# EAGLE board BaromBoard (EAGLE 6.3)
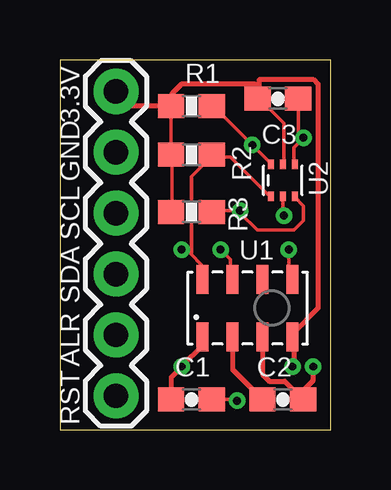
[diagram p0: board, top side]
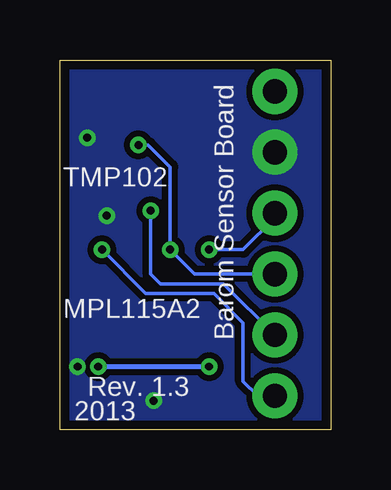
[diagram p1: board, bottom side, seen from below]

Size 11.3 x 15.43 mm. Coordinates in mm from the lower left corner, seen from the top.
Outline: 0,0 11.3,0 11.3,15.43 0,15.43 0,0
Copper layers (1*16): Top 0.0356mm / dielectric 1.5011mm / Bottom 0.0356mm
Design rules "LaenPCBOrder *": minimum track width 6mil, minimum drill 13mil, track to track 6mil, track to pad 6mil, pad to pad 6mil, via to via 6mil, smd to smd 6mil, copper to edge 15mil, drill to drill 6mil, minimum pad ring 7mil, minimum via ring 7mil, stop-mask expansion 4mil, vias tented up to drill 13mil, thermal gap 10mil

## Footprints (pad centres in the part's own frame; a part is rotated, then mirrored left to right if it is on the bottom)
0603-CAP = smd 1.1 x 1: 1 -0.85,0; 2 0.85,0
1X06 = drill 1.016 pad 1.88: 1 0,0; 2 2.54,0; 3 5.08,0; 4 7.62,0; 5 10.16,0; 6 12.7,0
0603-RES = smd 1.1 x 1: 1 -0.85,0; 2 0.85,0
SOT563 = smd 0.25 x 0.4: 1 -0.5,-0.66; 2 0,-0.66; 3 0.5,-0.66; 4 0.5,0.66; 5 0,0.66; 6 -0.5,0.67
LGA8 = smd 1.2 x 0.5: 1 -1.2,1.875; 2 -1.2,0.625; 3 -1.2,-0.625; 4 -1.2,-1.875; 5 1.2,-1.875; 6 1.2,-0.625; 7 1.2,0.625; 8 1.2,1.875

## Placement (x,y rotation side)
C1  1uF  [0603-CAP]  5.49,1.27 0 top
C2  1uF  [0603-CAP]  9.3,1.27 0 top
C3  1uF  [0603-CAP]  9.09,13.82 0 top
JP1  [1X06]  2.34,14.12 270 top
R1  [0603-RES]  5.49,13.51 180 top
R2  [0603-RES]  5.49,11.48 180 top
R3  [0603-RES]  5.49,9.09 0 top
TMP102  TMP102  [SOT563]  9.3,10.41 0 top
U1  MPL115A  [LGA8]  7.82,5.08 90 top

## Library data of the parts
C1-C3 R1-R3 = SparkFun-Passives
JP1 = SparkFun-Connectors
TMP102 U1 = SparkFun-Sensors

## Nets
3.3V: C1.1 C3.1 JP1.1 R1.2 R2.2 R3.1 TMP102.5 U1.1 U1.4
ALERT: JP1.5 R3.2 TMP102.3
GND: C1.2 C2.2 C3.2 JP1.2 TMP102.2 TMP102.4 U1.3
MPL_RST: JP1.6 U1.5
N$9: C2.1 U1.2
SCL: JP1.3 R2.1 TMP102.1 U1.8
SDA: JP1.4 R1.1 TMP102.6 U1.7

## Tracks (layer width: path | path; a pad name or v marks a point on that pad's centre or on a via)
3.3V  (via drill 0.33)
  Top 0.152: 4.27,1.42 C1.1 4.67,1.51 | R3.1 4.67,9.14 4.67,11.38 | 4.67,11.38 R2.2 | TMP102.5 9.35,11.18 9.35,12.8 8.33,13.82 C3.1 | 9.75,4.06 U1.4 9.75,3.86 | R1.2 R2.2 | 4.67,11.38 4.67,11.44 R2.2
  Top 0.203: 9.75,4.06 10.77,5.08 10.77,14.43 10.57,14.63 8.33,14.63 8.33,13.82 | 9.75,3.86 9.75,2.69 v9.7,2.64 | C1.1 4.64,2.2 v5.08,2.64 5.95,3.51 U1.1 | JP1.1 2.95,13.51 R1.2 4.67,13.55 4.67,14.02 5.08,14.43 8.13,14.43 8.24,14.31 C3.1
  Bottom 0.203: v9.7,2.64 v5.08,2.64
ALERT  (via drill 0.33)
  Top 0.152: TMP102.3 9.8,9.71 10.16,9.35 10.16,8.74 9.75,8.33 8.23,8.33 7.52,9.04 v7.52,9.14 6.39,9.14 R3.2
  Bottom 0.152: JP1.5 4.47,6.1 7.11,6.1 7.52,6.5 v7.52,9.14
GND  (via drill 0.33)
  Top 0.152: 9.94,1.44 C2.2 | TMP102.4 9.75,11.18 9.75,11.79 v10.16,12.19 9.94,12.41 C3.2 9.75,13.82 | TMP102.2 9.3,8.99 v9.35,8.94 | C1.2 7.37,1.27 v7.39,1.22
  Top 0.203: 9.94,1.44 10.57,2.06 v10.57,2.64 | U1.3 8.45,2.97 8.45,2.32 8.74,2.03 9.38,2.03 C2.2
  pour Bottom (isolate 0.254, no thermals): 0,0 0,15.44 11.38,15.44 11.38,0
MPL_RST  (via drill 0.33)
  Top 0.152: U1.5 9.55,6.3 v9.55,7.52
  Bottom 0.152: JP1.6 3.05,1.42 3.66,2.03 3.66,4.47 4.88,5.69 7.72,5.69 v9.55,7.52
N$9
  Top 0.203: U1.2 7.2,2.52 C2.1
SCL  (via drill 0.33)
  Top 0.152: TMP102.1 8.74,9.75 7.11,11.38 6.5,11.38 R2.1 6.3,11.38 5.49,10.57 5.49,7.32 | U1.8 5.89,6.3 5.89,6.91 5.49,7.32 | 5.49,7.32 5.28,7.52 v5.08,7.52
  Bottom 0.152: v5.08,7.52 3.66,7.52 2.34,8.84 JP1.3
SDA  (via drill 0.33)
  Top 0.152: TMP102.6 8.74,11.18 v8.03,11.89 7.72,12.19 6.5,13.41 6.5,13.82 R1.1 | U1.7 7.11,6.3 7.11,7.11 v6.71,7.52
  Bottom 0.152: JP1.4 5.69,6.5 v6.71,7.52 6.71,10.97 7.62,11.89 v8.03,11.89

## Text on the board
tNames: 3.3V | U2 | GND | SCL | U1 | SDA | ALR | RST
bNames: Barom Sensor Board | TMP102 | MPL115A2 | Rev. 1.3 | 2013